# EAGLE board 00A-001-A (EAGLE 6.3)
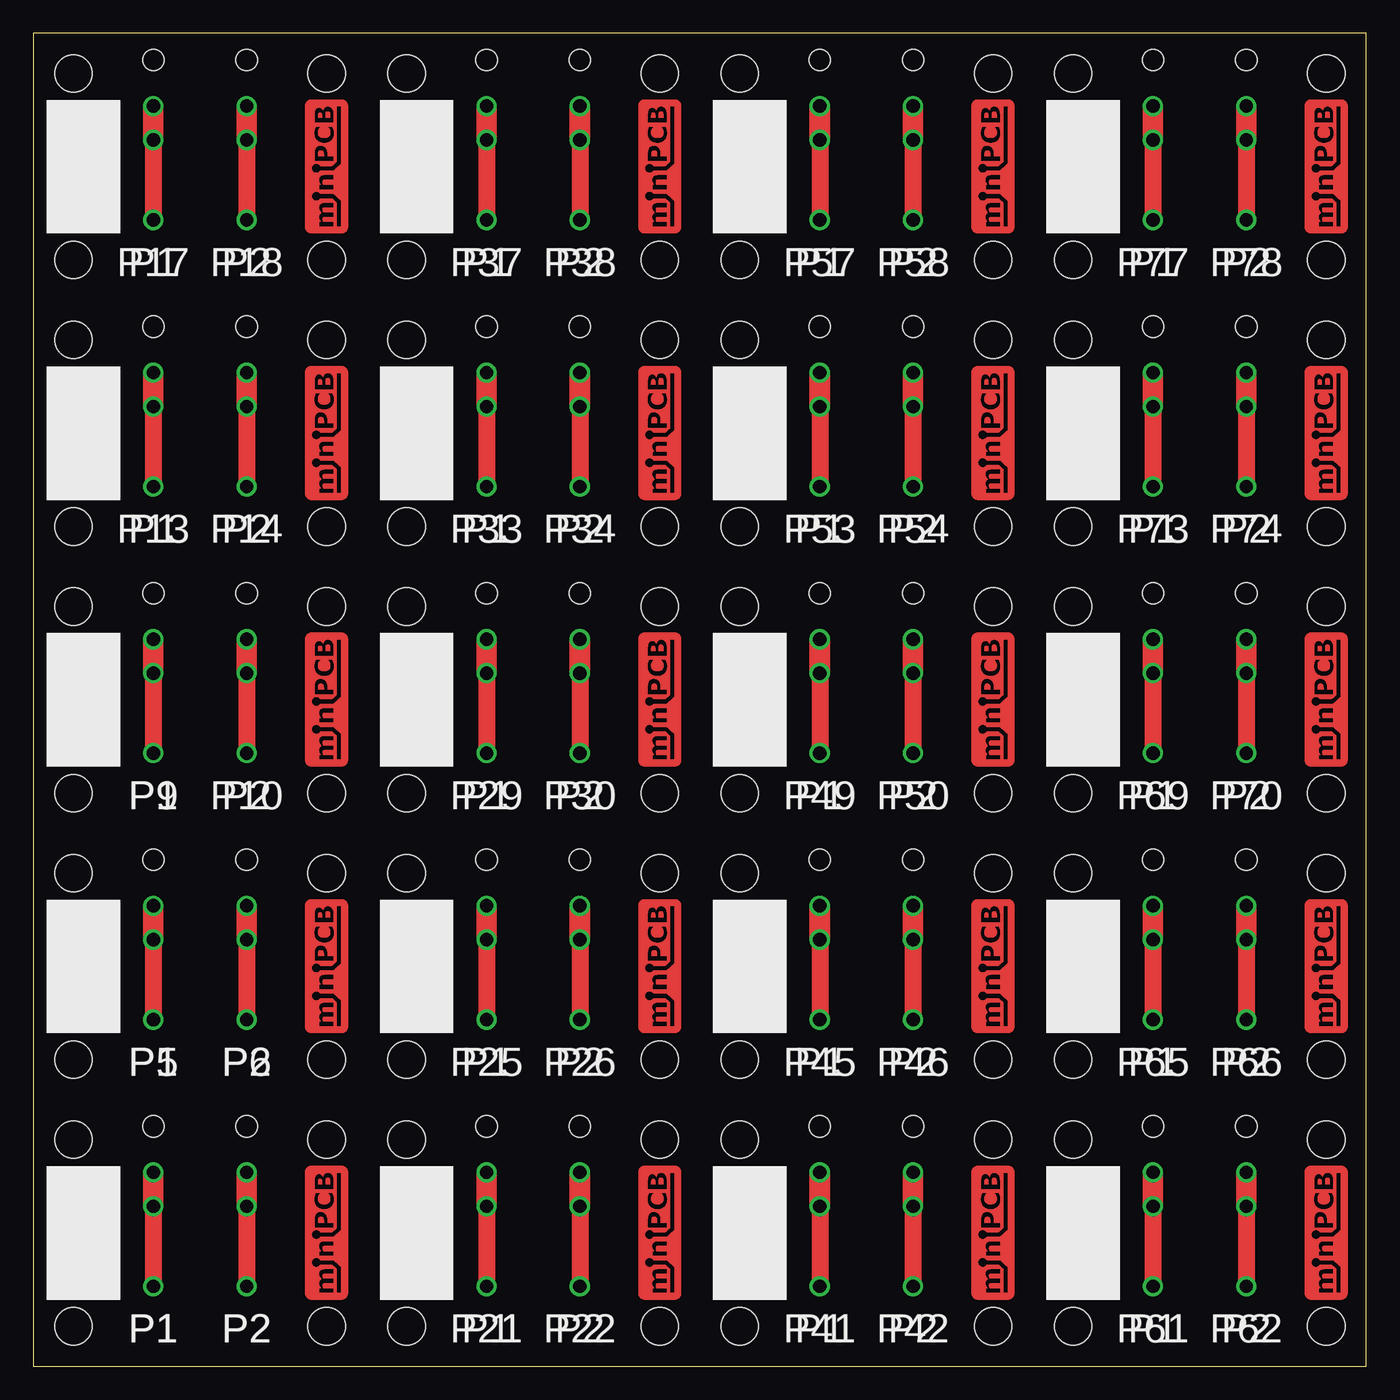
[diagram p0: board, top side]
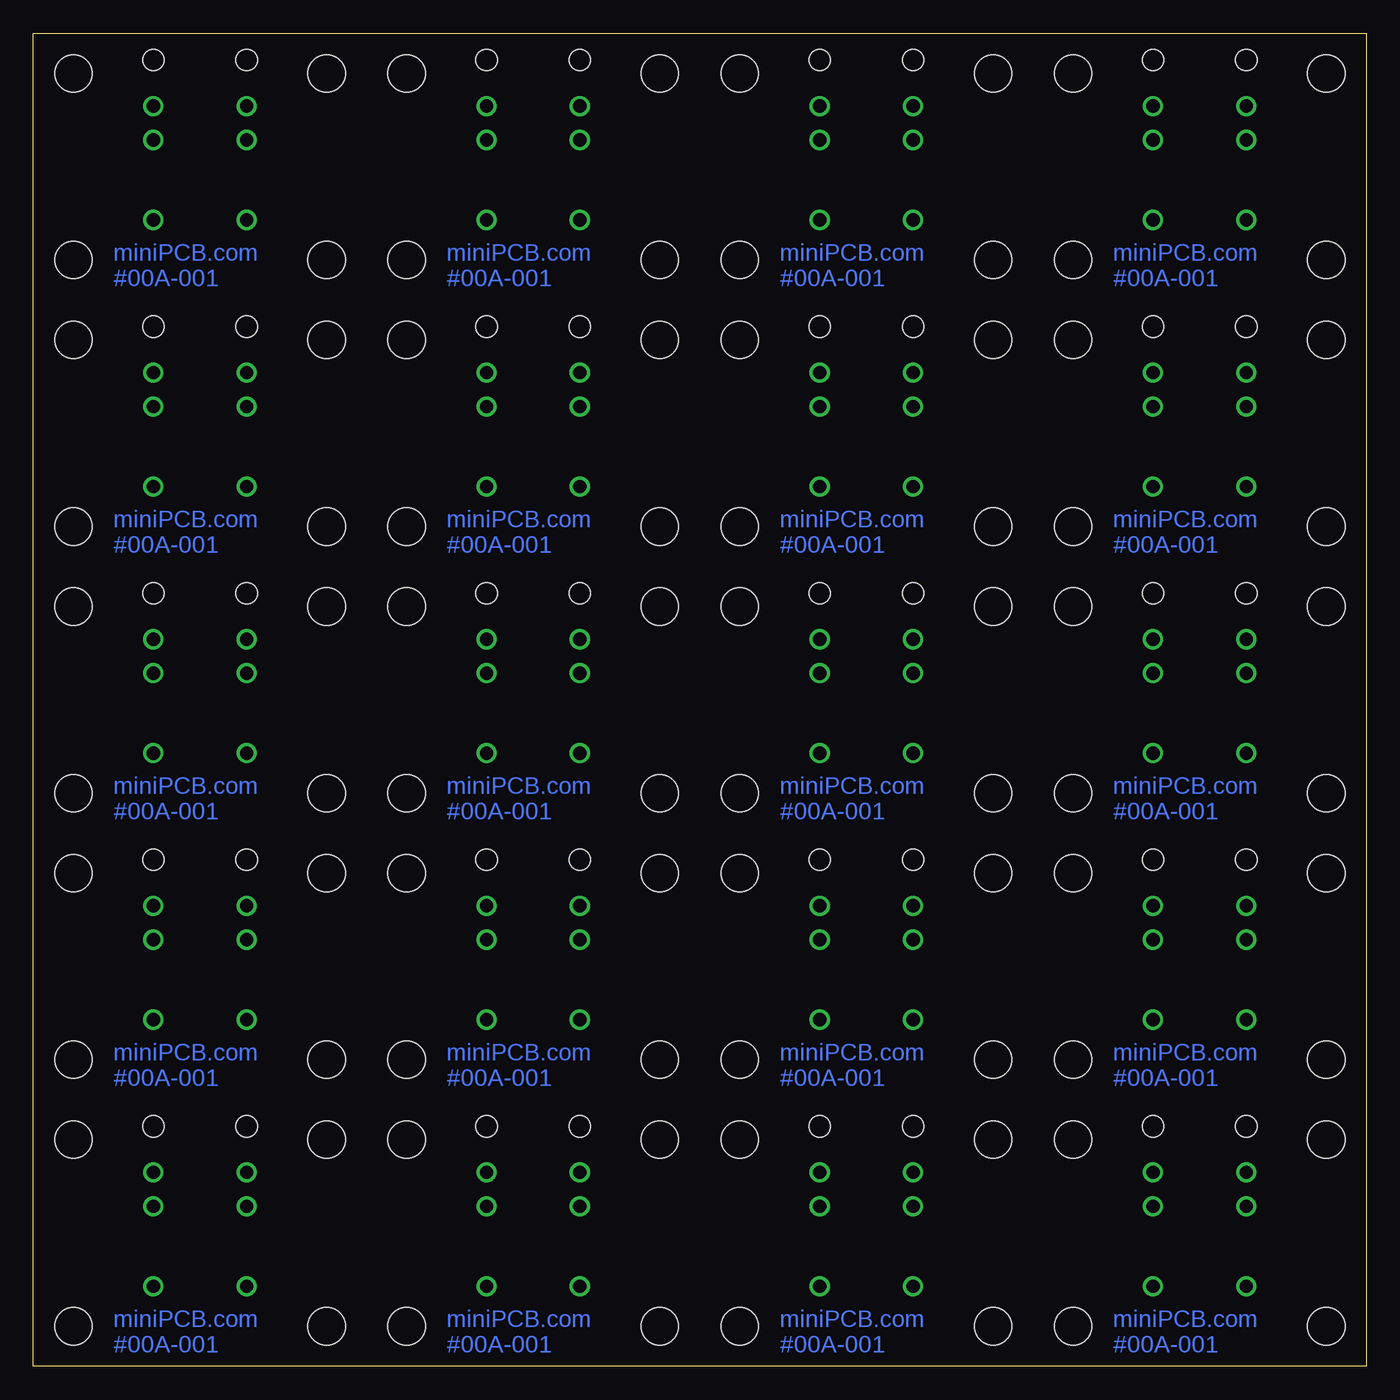
[diagram p1: board, bottom side, seen from below]

Size 100 x 100 mm. Coordinates in mm from the lower left corner, seen from the top.
Outline: 0,0 100,0 100,100 0,100 0,0
Copper layers (1*16): Top 0.035mm / dielectric 1.5mm / Bottom 0.035mm
Design rules "default": minimum track width 10mil, minimum drill 24mil, track to track 8mil, track to pad 8mil, pad to pad 8mil, via to via 8mil, smd to smd 8mil, copper to edge 40mil, drill to drill 8mil, minimum pad ring 10mil, minimum via ring 8mil, stop-mask expansion 4mil, vias tented up to drill 0mil, thermal gap 10mil
Holes 1.6 mm at 9,18 16,18 9,38 16,38 9,58 16,58 9,78 16,78 9,98 16,98 34,18 41,18 34,38 41,38 34,58 41,58 34,78 41,78 34,98 41,98 59,18 66,18 59,38 66,38 59,58 66,58 59,78 66,78 59,98 66,98 84,18 91,18 84,38 91,38 84,58 91,58 84,78 91,78 84,98 91,98
Holes 2.8 mm at 3,17 3,3 22,3 22,17 3,37 3,23 22,23 22,37 3,57 3,43 22,43 22,57 3,77 3,63 22,63 22,77 3,97 3,83 22,83 22,97 28,17 28,3 47,3 47,17 28,37 28,23 47,23 47,37 28,57 28,43 47,43 47,57 28,77 28,63 47,63 47,77 28,97 28,83 47,83 47,97 53,17 53,3 72,3 72,17 53,37 53,23 72,23 72,37 53,57 53,43 72,43 72,57 53,77 53,63 72,63 72,77 53,97 53,83 72,83 72,97 78,17 78,3 97,3 97,17 78,37 78,23 97,23 97,37 78,57 78,43 97,43 97,57 78,77 78,63 97,63 97,77 78,97 78,83 97,83 97,97

## Footprints (pad centres in the part's own frame; a part is rotated, then mirrored left to right if it is on the bottom)
PINS_1_TESTPOINT_KE5000 = drill 1: 1 0,0
PINS_1_1MM = drill 1: 1 0,0; 2 2.54,0

## Placement (x,y rotation side)
E$1  [MINIPCB-LOGO]  22,90 90 top
E$2  [MINIPCB-LOGO]  22,70 90 top
E$3  [MINIPCB-LOGO]  22,50 90 top
E$4  [MINIPCB-LOGO]  22,30 90 top
E$5  [MINIPCB-LOGO]  22,10 90 top
E$6  [MINIPCB-LOGO]  47,10 90 top
E$7  [MINIPCB-LOGO]  47,30 90 top
E$8  [MINIPCB-LOGO]  47,50 90 top
E$9  [MINIPCB-LOGO]  47,70 90 top
E$10  [MINIPCB-LOGO]  47,90 90 top
E$11  [MINIPCB-LOGO]  72,90 90 top
E$12  [MINIPCB-LOGO]  97,90 90 top
E$13  [MINIPCB-LOGO]  72,70 90 top
E$14  [MINIPCB-LOGO]  97,70 90 top
E$15  [MINIPCB-LOGO]  72,50 90 top
E$16  [MINIPCB-LOGO]  97,50 90 top
E$17  [MINIPCB-LOGO]  72,30 90 top
E$18  [MINIPCB-LOGO]  97,30 90 top
E$19  [MINIPCB-LOGO]  72,10 90 top
E$20  [MINIPCB-LOGO]  97,10 90 top
P1  [PINS_1_TESTPOINT_KE5000]  9,6 180 top
P2  [PINS_1_TESTPOINT_KE5000]  16,6 180 top
P3  [PINS_1_1MM]  9,12 90 top
P4  [PINS_1_1MM]  16,12 90 top
P5  [PINS_1_TESTPOINT_KE5000]  9,26 180 top
P6  [PINS_1_TESTPOINT_KE5000]  16,26 180 top
P7  [PINS_1_1MM]  9,32 90 top
P8  [PINS_1_1MM]  16,32 90 top
P9  [PINS_1_TESTPOINT_KE5000]  9,46 180 top
P10  [PINS_1_TESTPOINT_KE5000]  16,46 180 top
P11  [PINS_1_1MM]  9,52 90 top
P12  [PINS_1_1MM]  16,52 90 top
P13  [PINS_1_TESTPOINT_KE5000]  9,66 180 top
P14  [PINS_1_TESTPOINT_KE5000]  16,66 180 top
P15  [PINS_1_1MM]  9,72 90 top
P16  [PINS_1_1MM]  16,72 90 top
P17  [PINS_1_TESTPOINT_KE5000]  9,86 180 top
P18  [PINS_1_TESTPOINT_KE5000]  16,86 180 top
P19  [PINS_1_1MM]  9,92 90 top
P20  [PINS_1_1MM]  16,92 90 top
P21  [PINS_1_TESTPOINT_KE5000]  34,6 180 top
P22  [PINS_1_TESTPOINT_KE5000]  41,6 180 top
P23  [PINS_1_1MM]  34,12 90 top
P24  [PINS_1_1MM]  41,12 90 top
P25  [PINS_1_TESTPOINT_KE5000]  34,26 180 top
P26  [PINS_1_TESTPOINT_KE5000]  41,26 180 top
P27  [PINS_1_1MM]  34,32 90 top
P28  [PINS_1_1MM]  41,32 90 top
P29  [PINS_1_TESTPOINT_KE5000]  34,46 180 top
P30  [PINS_1_TESTPOINT_KE5000]  41,46 180 top
P31  [PINS_1_1MM]  34,52 90 top
P32  [PINS_1_1MM]  41,52 90 top
P33  [PINS_1_TESTPOINT_KE5000]  34,66 180 top
P34  [PINS_1_TESTPOINT_KE5000]  41,66 180 top
P35  [PINS_1_1MM]  34,72 90 top
P36  [PINS_1_1MM]  41,72 90 top
P37  [PINS_1_TESTPOINT_KE5000]  34,86 180 top
P38  [PINS_1_TESTPOINT_KE5000]  41,86 180 top
P39  [PINS_1_1MM]  34,92 90 top
P40  [PINS_1_1MM]  41,92 90 top
P41  [PINS_1_TESTPOINT_KE5000]  59,6 180 top
P42  [PINS_1_TESTPOINT_KE5000]  66,6 180 top
P43  [PINS_1_1MM]  59,12 90 top
P44  [PINS_1_1MM]  66,12 90 top
P45  [PINS_1_TESTPOINT_KE5000]  59,26 180 top
P46  [PINS_1_TESTPOINT_KE5000]  66,26 180 top
P47  [PINS_1_1MM]  59,32 90 top
P48  [PINS_1_1MM]  66,32 90 top
P49  [PINS_1_TESTPOINT_KE5000]  59,46 180 top
P50  [PINS_1_TESTPOINT_KE5000]  66,46 180 top
P51  [PINS_1_1MM]  59,52 90 top
P52  [PINS_1_1MM]  66,52 90 top
P53  [PINS_1_TESTPOINT_KE5000]  59,66 180 top
P54  [PINS_1_TESTPOINT_KE5000]  66,66 180 top
P55  [PINS_1_1MM]  59,72 90 top
P56  [PINS_1_1MM]  66,72 90 top
P57  [PINS_1_TESTPOINT_KE5000]  59,86 180 top
P58  [PINS_1_TESTPOINT_KE5000]  66,86 180 top
P59  [PINS_1_1MM]  59,92 90 top
P60  [PINS_1_1MM]  66,92 90 top
P61  [PINS_1_TESTPOINT_KE5000]  84,6 180 top
P62  [PINS_1_TESTPOINT_KE5000]  91,6 180 top
P63  [PINS_1_1MM]  84,12 90 top
P64  [PINS_1_1MM]  91,12 90 top
P65  [PINS_1_TESTPOINT_KE5000]  84,26 180 top
P66  [PINS_1_TESTPOINT_KE5000]  91,26 180 top
P67  [PINS_1_1MM]  84,32 90 top
P68  [PINS_1_1MM]  91,32 90 top
P69  [PINS_1_TESTPOINT_KE5000]  84,46 180 top
P70  [PINS_1_TESTPOINT_KE5000]  91,46 180 top
P71  [PINS_1_1MM]  84,52 90 top
P72  [PINS_1_1MM]  91,52 90 top
P73  [PINS_1_TESTPOINT_KE5000]  84,66 180 top
P74  [PINS_1_TESTPOINT_KE5000]  91,66 180 top
P75  [PINS_1_1MM]  84,72 90 top
P76  [PINS_1_1MM]  91,72 90 top
P77  [PINS_1_TESTPOINT_KE5000]  84,86 180 top
P78  [PINS_1_TESTPOINT_KE5000]  91,86 180 top
P79  [PINS_1_1MM]  84,92 90 top
P80  [PINS_1_1MM]  91,92 90 top

## Library data of the parts
E$1-E$20 P1-P80 = nolan-utsa

## Nets
N$1: P1.1 P3.1 P3.2
N$2: P2.1 P4.1 P4.2
N$3: P5.1 P7.1 P7.2
N$4: P6.1 P8.1 P8.2
N$5: P9.1 P11.1 P11.2
N$6: P10.1 P12.1 P12.2
N$7: P13.1 P15.1 P15.2
N$8: P14.1 P16.1 P16.2
N$9: P17.1 P19.1 P19.2
N$10: P18.1 P20.1 P20.2
N$11: P21.1 P23.1 P23.2
N$12: P22.1 P24.1 P24.2
N$13: P25.1 P27.1 P27.2
N$14: P26.1 P28.1 P28.2
N$15: P29.1 P31.1 P31.2
N$16: P30.1 P32.1 P32.2
N$17: P33.1 P35.1 P35.2
N$18: P34.1 P36.1 P36.2
N$19: P37.1 P39.1 P39.2
N$20: P38.1 P40.1 P40.2
N$21: P41.1 P43.1 P43.2
N$22: P42.1 P44.1 P44.2
N$23: P45.1 P47.1 P47.2
N$24: P46.1 P48.1 P48.2
N$25: P49.1 P51.1 P51.2
N$26: P50.1 P52.1 P52.2
N$27: P53.1 P55.1 P55.2
N$28: P54.1 P56.1 P56.2
N$29: P57.1 P59.1 P59.2
N$30: P58.1 P60.1 P60.2
N$31: P61.1 P63.1 P63.2
N$32: P62.1 P64.1 P64.2
N$33: P65.1 P67.1 P67.2
N$34: P66.1 P68.1 P68.2
N$35: P69.1 P71.1 P71.2
N$36: P70.1 P72.1 P72.2
N$37: P73.1 P75.1 P75.2
N$38: P74.1 P76.1 P76.2
N$39: P77.1 P79.1 P79.2
N$40: P78.1 P80.1 P80.2

## Tracks (layer width: path | path; a pad name or v marks a point on that pad's centre or on a via)
N$1
  Top 1.27: P3.2 P3.1 P1.1
N$2
  Top 1.27: P4.2 P4.1 P2.1
N$3
  Top 1.27: P7.2 P7.1 P5.1
N$4
  Top 1.27: P8.2 P8.1 P6.1
N$5
  Top 1.27: P11.2 P11.1 P9.1
N$6
  Top 1.27: P12.2 P12.1 P10.1
N$7
  Top 1.27: P15.2 P15.1 P13.1
N$8
  Top 1.27: P16.2 P16.1 P14.1
N$9
  Top 1.27: P19.2 P19.1 P17.1
N$10
  Top 1.27: P20.2 P20.1 P18.1
N$11
  Top 1.27: P23.2 P23.1 P21.1
N$12
  Top 1.27: P24.2 P24.1 P22.1
N$13
  Top 1.27: P27.2 P27.1 P25.1
N$14
  Top 1.27: P28.2 P28.1 P26.1
N$15
  Top 1.27: P31.2 P31.1 P29.1
N$16
  Top 1.27: P32.2 P32.1 P30.1
N$17
  Top 1.27: P35.2 P35.1 P33.1
N$18
  Top 1.27: P36.2 P36.1 P34.1
N$19
  Top 1.27: P39.2 P39.1 P37.1
N$20
  Top 1.27: P40.2 P40.1 P38.1
N$21
  Top 1.27: P43.2 P43.1 P41.1
N$22
  Top 1.27: P44.2 P44.1 P42.1
N$23
  Top 1.27: P47.2 P47.1 P45.1
N$24
  Top 1.27: P48.2 P48.1 P46.1
N$25
  Top 1.27: P51.2 P51.1 P49.1
N$26
  Top 1.27: P52.2 P52.1 P50.1
N$27
  Top 1.27: P55.2 P55.1 P53.1
N$28
  Top 1.27: P56.2 P56.1 P54.1
N$29
  Top 1.27: P59.2 P59.1 P57.1
N$30
  Top 1.27: P60.2 P60.1 P58.1
N$31
  Top 1.27: P63.2 P63.1 P61.1
N$32
  Top 1.27: P64.2 P64.1 P62.1
N$33
  Top 1.27: P67.2 P67.1 P65.1
N$34
  Top 1.27: P68.2 P68.1 P66.1
N$35
  Top 1.27: P71.2 P71.1 P69.1
N$36
  Top 1.27: P72.2 P72.1 P70.1
N$37
  Top 1.27: P75.2 P75.1 P73.1
N$38
  Top 1.27: P76.2 P76.1 P74.1
N$39
  Top 1.27: P79.2 P79.1 P77.1
N$40
  Top 1.27: P80.2 P80.1 P78.1

## Text on the board
Bottom: miniPCB.com / #00A-001 | miniPCB.com / #00A-001 | miniPCB.com / #00A-001 | miniPCB.com / #00A-001 | miniPCB.com / #00A-001 | miniPCB.com / #00A-001 | miniPCB.com / #00A-001 | miniPCB.com / #00A-001 | miniPCB.com / #00A-001 | miniPCB.com / #00A-001 | miniPCB.com / #00A-001 | miniPCB.com / #00A-001 | miniPCB.com / #00A-001 | miniPCB.com / #00A-001 | miniPCB.com / #00A-001 | miniPCB.com / #00A-001 | miniPCB.com / #00A-001 | miniPCB.com / #00A-001 | miniPCB.com / #00A-001 | miniPCB.com / #00A-001
_tPlace: P1 | P2 | P1 | P2 | P1 | P2 | P1 | P2 | P1 | P2 | P1 | P2 | P1 | P2 | P1 | P2 | P1 | P2 | P1 | P2 | P1 | P2 | P1 | P2 | P1 | P2 | P1 | P2 | P1 | P2 | P1 | P2 | P1 | P2 | P1 | P2 | P1 | P2 | P1 | P2